# EAGLE board 3PhaseDriver (EAGLE 6.4)
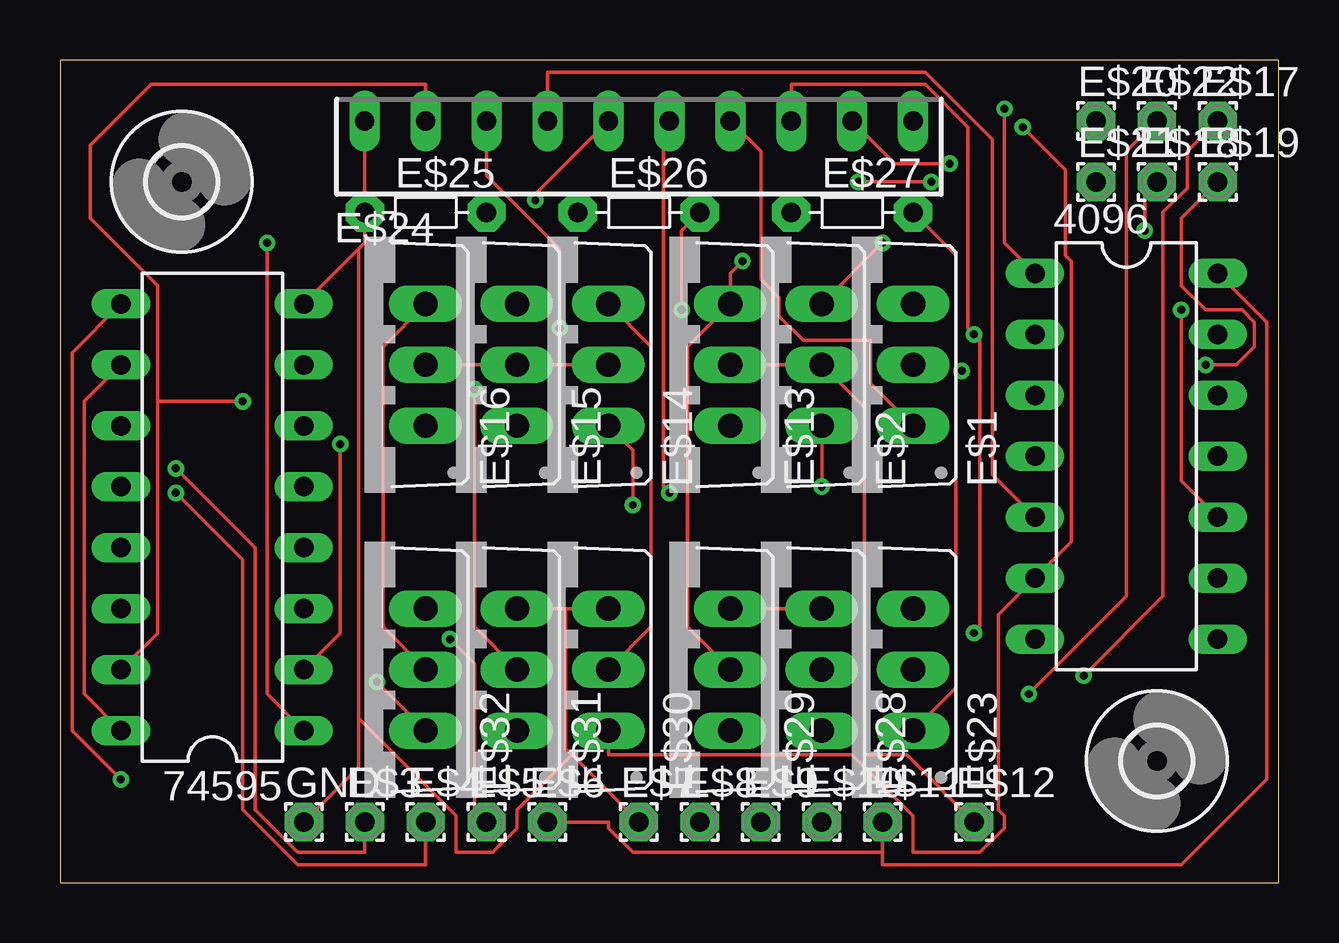
[diagram p0: board, top side]
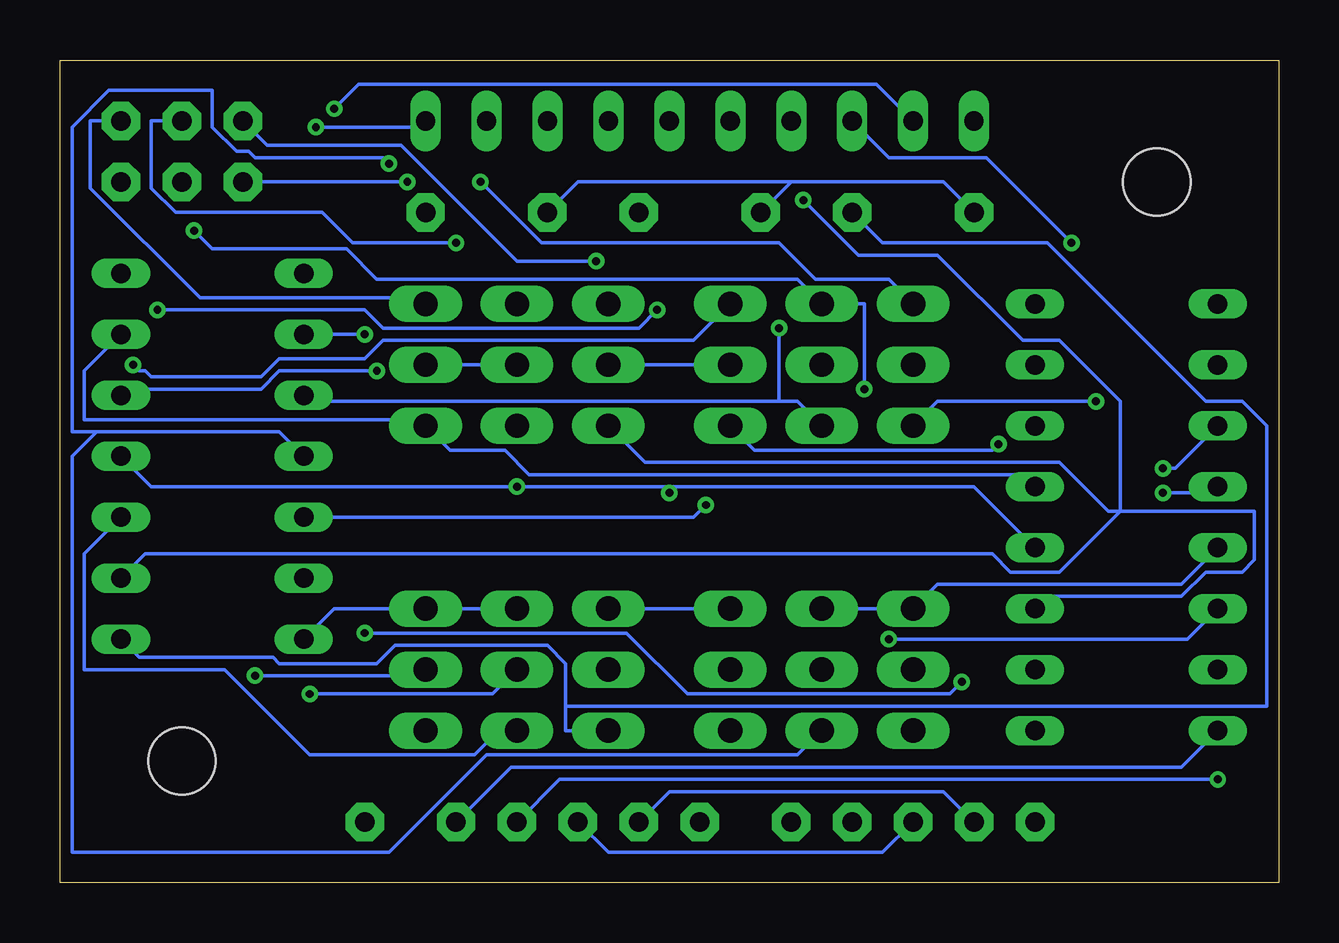
[diagram p1: board, bottom side, seen from below]

Size 50.8 x 34.29 mm. Coordinates in mm from the lower left corner, seen from the top.
Outline: 0,34.29 0,0 50.8,0 50.8,34.29 0,34.29
Copper layers (1*16): Top 0.0356mm / dielectric 1.5011mm / Bottom 0.0356mm
Design rules "LaenPCBOrder": minimum track width 6mil, minimum drill 13mil, track to track 6mil, track to pad 6mil, pad to pad 6mil, via to via 6mil, smd to smd 6mil, copper to edge 15mil, drill to drill 6mil, minimum pad ring 7mil, minimum via ring 7mil, stop-mask expansion 4mil, vias tented up to drill 0mil, thermal gap 10mil

## Footprints (pad centres in the part's own frame; a part is rotated, then mirrored left to right if it is on the bottom)
DIL14 = drill 0.813 long: 1 -7.62,-3.81; 2 -5.08,-3.81; 3 -2.54,-3.81; 4 0,-3.81; 5 2.54,-3.81; 6 5.08,-3.81; 7 7.62,-3.81; 8 7.62,3.81; 9 5.08,3.81; 10 2.54,3.81; 11 0,3.81; 12 -2.54,3.81; 13 -5.08,3.81; 14 -7.62,3.81
DIL16 = drill 0.813 long: 1 -8.89,-3.81; 2 -6.35,-3.81; 3 -3.81,-3.81; 4 -1.27,-3.81; 5 1.27,-3.81; 6 3.81,-3.81; 7 6.35,-3.81; 8 8.89,-3.81; 9 8.89,3.81; 10 6.35,3.81; 11 3.81,3.81; 12 1.27,3.81; 13 -1.27,3.81; 14 -3.81,3.81; 15 -6.35,3.81; 16 -8.89,3.81
TO220V = drill 1.016 long: 1 -2.54,-2.54; 2 0,-2.54; 3 2.54,-2.54
1,6/0,8 = drill 0.813 pad 1.6 octagon: 1 0,0
SIP-10 = drill 0.8 pad 1.27 long: 1 -11.43,0; 2 -8.89,0; 3 -6.35,0; 4 -3.81,0; 5 -1.27,0; 6 1.27,0; 7 3.81,0; 8 6.35,0; 9 8.89,0; 10 11.43,0
R-5 = drill 0.813 pad 1.6 octagon: 1 -2.54,0; 2 2.54,0
2,8 = hole 2.8: 0,0

## Placement (x,y rotation side)
4096  4069  [DIL14]  44.45,17.78 270 top
74595  74595  [DIL16]  6.35,15.24 90 top
E$1  [TO220V]  33.02,21.59 90 top
E$2  [TO220V]  29.21,21.59 90 top
E$3  [1,6/0,8]  12.7,2.54 0 top
E$4  [1,6/0,8]  15.24,2.54 0 top
E$5  [1,6/0,8]  17.78,2.54 0 top
E$6  [1,6/0,8]  20.32,2.54 0 top
E$7  [1,6/0,8]  24.13,2.54 0 top
E$8  [1,6/0,8]  26.67,2.54 0 top
E$9  [1,6/0,8]  29.21,2.54 0 top
E$10  [1,6/0,8]  31.75,2.54 0 top
E$11  [1,6/0,8]  34.29,2.54 0 top
E$12  [1,6/0,8]  38.1,2.54 0 top
E$13  [TO220V]  25.4,21.59 90 top
E$14  [TO220V]  20.32,21.59 90 top
E$15  [TO220V]  16.51,21.59 90 top
E$16  [TO220V]  12.7,21.59 90 top
E$17  [1,6/0,8]  48.26,31.75 0 top
E$18  [1,6/0,8]  45.72,29.21 0 top
E$19  [1,6/0,8]  48.26,29.21 0 top
E$20  [1,6/0,8]  43.18,31.75 0 top
E$21  [1,6/0,8]  43.18,29.21 0 top
E$22  [1,6/0,8]  45.72,31.75 0 top
E$23  [TO220V]  33.02,8.89 90 top
E$24  [SIP-10]  24.13,31.75 0 top
E$25  [R-5]  15.24,27.94 0 top
E$26  [R-5]  24.13,27.94 0 top
E$27  [R-5]  33.02,27.94 0 top
E$28  [TO220V]  29.21,8.89 90 top
E$29  [TO220V]  25.4,8.89 90 top
E$30  [TO220V]  20.32,8.89 90 top
E$31  [TO220V]  16.51,8.89 90 top
E$32  [TO220V]  12.7,8.89 90 top
E$40  [2,8]  5.08,29.21 0 top
E$42  [2,8]  45.72,5.08 0 top
GND  [1,6/0,8]  10.16,2.54 0 top

## Library data of the parts
4096 = 40xx
74595 = 74xx-us
E$1 E$2 E$13-E$16 E$23 E$28-E$32 = transistor-pnp
E$3-E$12 E$17-E$22 GND = wirepad
E$24 = linear
E$25-E$27 = discrete
E$40 E$42 = holes

## Nets
S$1: 4096.7 74595.8 74595.13 E$7.1 E$23.3 E$24.1 E$25.1 E$26.1 E$27.1 E$28.3 E$29.3 E$30.3 E$31.3 E$32.3 GND.1
S$2: 4096.14 74595.10 74595.16 E$6.1 E$11.1
S$3: 74595.11 E$3.1 E$8.1
S$4: 74595.12 E$4.1 E$9.1
S$5: 74595.14 E$5.1
S$6: 74595.9 E$10.1
S$7: 4096.1 74595.15 E$16.1 E$24.2
S$8: 4096.3 74595.1 E$15.1 E$24.3
S$9: E$1.2 E$2.2 E$12.1 E$13.2 E$14.2 E$15.2 E$16.2
S$11: 4096.5 74595.2 E$14.1 E$24.4
S$15: 4096.9 74595.3 E$13.1 E$24.5
S$16: 4096.11 74595.4 E$2.1 E$24.6
S$17: 4096.13 74595.5 E$1.1 E$24.7
S$18: 4096.2 E$24.8 E$32.1
S$19: 4096.4 E$24.9 E$31.1
S$20: 4096.6 E$24.10 E$30.1
S$23: 74595.6
S$24: 74595.7
S$25: 4096.8 E$25.2 E$29.1
S$26: 4096.10 E$26.2 E$28.1
S$27: 4096.12 E$23.1 E$27.2
S$28: E$16.3 E$21.1 E$32.2
S$29: E$15.3 E$18.1 E$31.2
S$30: E$14.3 E$19.1 E$30.2
S$31: E$13.3 E$20.1 E$29.2
S$32: E$2.3 E$22.1 E$28.2
S$33: E$1.3 E$17.1 E$23.2

## Tracks (layer width: path | path; a pad name or v marks a point on that pad's centre or on a via)
S$1
  Top 0.152: E$28.3 E$29.3 | E$30.3 21.08,11.43 | 21.08,11.43 E$31.3 | 21.34,5.33 21.08,5.59 21.08,11.43 | 21.34,5.33 E$7.1 | 12.45,26.42 12.7,26.67 E$25.1 E$24.1 | 12.45,26.42 74595.8 | GND.1 12.45,4.83 12.45,6.86 | 12.45,26.42 12.45,6.86 | 21.34,5.33 19.05,3.05 19.05,2.29 18.03,1.27 16.51,1.27 16.51,2.79 12.45,6.86
  Bottom 0.152: 74595.13 4.06,12.45 14.22,12.45 E$32.3 E$31.3 | 4096.7 39.37,11.43 E$23.3 E$28.3 | E$30.3 E$29.3 | 20.32,29.21 E$26.1 | 20.32,29.21 13.97,29.21 E$25.1 | E$27.1 29.21,29.21 20.32,29.21
S$2
  Top 0.152: 74595.16 1.02,7.87 1.02,20.07 74595.10 | 4096.14 50.29,23.37 50.29,4.32 46.74,0.76 34.29,0.76 34.29,1.27 | E$11.1 34.29,1.27 | E$6.1 22.86,2.54 22.86,2.29 23.88,1.27 34.29,1.27
  Bottom 0.152: 74595.16 4.06,4.83 32,4.83 E$11.1
S$3  (via drill 0.33)
  Top 0.152: v4.83,17.27 8.13,13.97 8.13,3.05 9.91,1.27 12.7,1.27 E$3.1
  Bottom 0.152: 74595.11 4.32,17.27 v4.83,17.27 | E$8.1 25.4,3.81 13.97,3.81 E$3.1
S$4  (via drill 0.33)
  Top 0.152: v4.83,16.26 7.62,13.46 7.62,3.05 9.91,0.76 15.24,0.76 E$4.1
  Bottom 0.152: 74595.12 2.79,16.26 v4.83,16.26 | E$9.1 27.94,1.27 16.51,1.27 E$4.1
S$5  (via drill 0.33)
  Top 0.152: v16.26,10.16 17.27,9.14 17.27,3.05 E$5.1
  Bottom 0.152: 74595.14 3.81,10.16 v16.26,10.16
S$6  (via drill 0.33)
  Top 0.152: 74595.9 0.51,22.1 0.51,6.35 v2.54,4.32
  Bottom 0.152: v2.54,4.32 29.97,4.32 E$10.1
S$7  (via drill 0.33)
  Top 0.152: 74595.15 4.06,10.41 4.06,20.07 | 4.06,20.07 4.06,24.89 1.27,27.69 1.27,30.73 3.81,33.27 15.24,33.27 E$24.2 | 4096.1 39.37,26.67 v39.37,32.26 | 4.06,20.07 v7.62,20.07
  Bottom 0.152: v39.37,32.26 38.35,33.27 16.76,33.27 E$24.2 | E$16.1 14.22,20.07 v7.62,20.07
S$8  (via drill 0.33)
  Top 0.152: 74595.1 8.64,7.87 v8.64,26.67 | v20.83,23.11 20.83,26.42 17.78,29.46 E$24.3
  Bottom 0.152: 4096.3 40.39,20.07 20.83,20.07 | 20.83,20.07 20.07,20.07 E$15.1 | v8.64,26.67 12.19,30.23 16.26,30.23 E$24.3 | v20.83,23.11 20.83,20.07
S$9
  Top 0.152: E$16.2 E$15.2 E$14.2 | E$13.2 E$2.2 33.53,19.81 33.53,5.33 35.31,5.33 E$12.1
  Bottom 0.152: E$2.2 E$1.2 | E$13.2 E$14.2
S$11  (via drill 0.33)
  Top 0.152: 74595.2 11.68,10.41 v11.68,18.29 | 4096.5 38.86,17.02 38.86,30.99 36.07,33.78 20.32,33.78 E$24.4 | E$14.1 23.88,18.03 v23.88,15.75
  Bottom 0.152: v11.68,18.29 11.94,18.03 21.84,18.03 E$14.1 | v23.88,15.75 24.38,15.24 4096.5
S$15  (via drill 0.33)
  Top 0.152: E$24.5 19.81,28.7 v19.81,28.45
  Bottom 0.152: 74595.3 9.65,11.94 4.06,11.94 3.05,12.95 1.52,12.95 1.02,13.46 1.02,15.49 6.6,15.49 | 6.6,15.49 7.11,15.49 9.14,17.53 26.42,17.53 E$13.1 | 4096.9 47.24,13.72 11.94,13.72 11.18,12.95 9.14,12.95 6.6,15.49 | v19.81,28.45 17.53,26.16 14.22,26.16 10.67,22.61 9.14,22.61 6.6,20.07 6.6,15.49
S$16  (via drill 0.33)
  Top 0.152: E$24.6 25.15,31.5 25.15,16.51 v25.4,16.26 | v31.75,16.51 E$2.1
  Bottom 0.152: 74595.4 12.7,16.51 25.4,16.51 | 25.4,16.51 v31.75,16.51 46.99,16.51 4096.11 | 25.4,16.51 v25.4,16.26
S$17
  Top 0.152: E$24.7 29.21,30.48 29.21,25.15 29.97,24.38 29.97,23.62 30.99,22.61 33.78,22.61 33.78,20.83 E$1.1
  Bottom 0.152: 74595.5 10.67,17.02 31.24,17.02 32.26,18.03 34.54,18.03 E$1.1 35.81,19.3 49.78,19.3 49.78,21.34 4096.13
S$18  (via drill 0.33)
  Top 0.152: E$24.8 30.48,33.27 36.07,33.27 37.85,31.5 37.85,23.11 v38.1,22.86 38.35,22.61 38.35,10.67 v38.1,10.41 | v13.21,8.38 E$32.1
  Bottom 0.152: v38.1,22.86 4096.2 | v13.21,8.38 13.72,7.87 24.64,7.87 27.18,10.41 v38.1,10.41
S$19  (via drill 0.33)
  Top 0.152: E$24.9 34.8,29.97 v37.08,29.97
  Bottom 0.152: 4096.4 41.66,18.8 49.28,18.8 | 49.28,18.8 50.29,17.78 50.29,1.27 37.08,1.27 33.02,5.33 20.07,5.33 E$31.1 | v37.08,29.97 37.34,30.23 42.67,30.23 42.93,30.48 43.43,30.48 44.45,31.5 44.45,33.02 48.77,33.02 50.29,31.5 50.29,18.8 49.28,18.8
S$20  (via drill 0.33)
  Top 0.152: E$30.1 22.86,5.33 33.02,5.33 35.56,2.79 35.56,1.27 38.35,1.27 39.37,2.29 39.37,2.79 39.12,3.05 39.12,11.18 4096.6 42.16,14.22 42.16,25.91 41.91,26.16 41.91,29.72 v40.13,31.5
  Bottom 0.152: E$24.10 35.81,31.5 v40.13,31.5
S$25
  Bottom 0.152: 4096.8 47.5,9.4 41.91,9.4 41.66,9.14 37.59,9.14 36.83,9.91 30.48,9.91 29.72,9.14 29.72,7.37 | 29.72,7.37 29.72,6.35 E$29.1 | E$25.2 16.51,26.67 9.65,26.67 3.05,20.07 1.52,20.07 0.51,19.05 0.51,7.37 29.72,7.37
S$26  (via drill 0.33)
  Top 0.152: E$26.2 25.91,27.18 v25.91,23.88 | v46.74,23.88 46.74,16.76 4096.10
  Bottom 0.152: 4096.10 49.78,13.72 49.78,8.89 43.94,8.89 40.39,5.33 33.53,5.33 32.51,6.35 E$28.1 | v25.91,23.88 26.67,23.11 37.34,23.11 38.1,23.88 v46.74,23.88
S$27  (via drill 0.33)
  Top 0.152: 37.34,21.59 v37.59,21.34 | 37.34,21.59 37.34,26.16 E$27.2 | E$23.1 37.34,8.13 37.34,21.59
  Bottom 0.152: 4096.12 48.01,20.57 42.42,20.57 41.66,21.34 v37.59,21.34
S$28  (via drill 0.33)
  Top 0.152: E$32.2 13.46,10.67 13.46,22.35 E$16.3 | v33.27,29.21 v36.32,29.21
  Bottom 0.152: v36.32,29.21 E$21.1 | v33.27,29.21 30.73,26.67 20.83,26.67 19.3,25.15 16.26,25.15 E$16.3
S$29  (via drill 0.33)
  Top 0.152: E$31.2 17.27,10.67 v17.27,20.57 | E$18.1 45.21,28.7 v45.21,27.18
  Bottom 0.152: v17.27,20.57 17.27,24.13 E$15.3 20.07,25.15 37.59,25.15 38.86,26.42 44.45,26.42 v45.21,27.18
S$30  (via drill 0.33)
  Top 0.152: E$30.2 24.64,10.67 24.64,22.35 E$14.3 | E$19.1 46.74,27.69 46.74,24.89 47.75,23.88 49.28,23.88 49.78,23.37 49.78,22.35 49.02,21.59 v47.75,21.59
  Bottom 0.152: v47.75,21.59 47.5,21.34 47.24,21.34 46.99,21.08 42.42,21.08 41.66,21.84 38.1,21.84 37.34,22.61 24.38,22.61 E$14.3
S$31  (via drill 0.33)
  Top 0.152: E$29.2 26.16,10.67 26.16,22.35 E$13.3 27.94,25.4 v28.45,25.91
  Bottom 0.152: E$20.1 42.16,30.73 36.58,30.73 31.75,25.91 v28.45,25.91
S$32  (via drill 0.33)
  Top 0.152: v40.39,7.87 44.45,11.94 44.45,30.48 E$22.1 | v34.29,26.67 E$2.3
  Bottom 0.152: E$28.2 32.77,7.87 v40.39,7.87 | v34.29,26.67 38.61,26.67 39.88,27.94 45.97,27.94 46.99,28.96 46.99,31.75 E$22.1
S$33  (via drill 0.33)
  Top 0.152: v42.67,8.64 45.97,11.94 45.97,27.94 46.99,28.96 46.99,30.48 E$17.1
  Bottom 0.152: E$23.2 35.81,8.64 v42.67,8.64 | E$1.3 35.81,24.38 44.96,24.38 49.53,28.96 49.53,31.75 E$17.1

## Text on the board
tNames: O2A | O2B | O2C | O1A | O1B | O1C | GND | SHCP | STCP | DS | Vcc | GND | SHCP | STCP | DS | Vcc | Vload